# EAGLE board Shield (EAGLE 9.5.1)
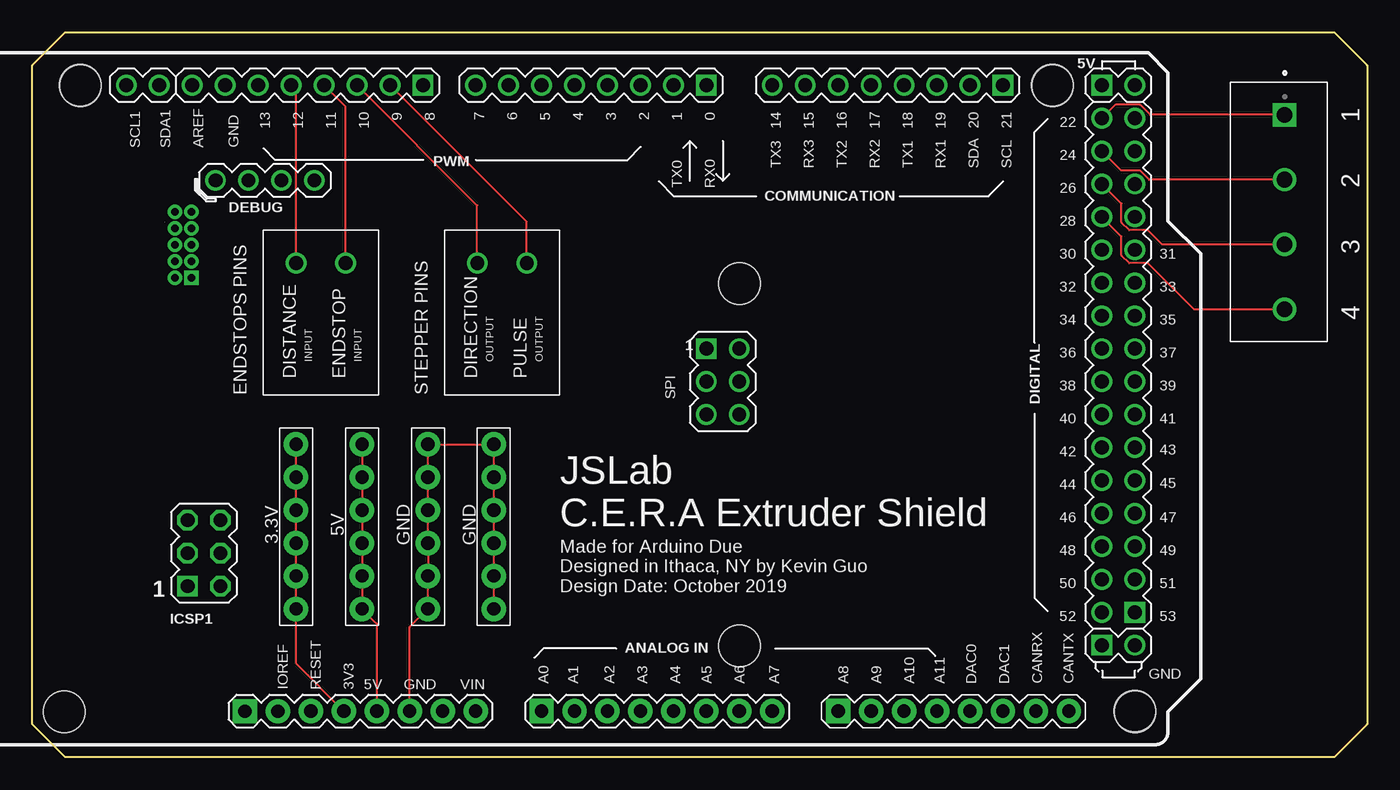
[diagram p0: board, top side]

Size 102.87 x 55.88 mm. Coordinates in mm from the lower left corner, seen from the top.
Outline: 2.54,0 0,2.54 0,53.34 2.54,55.88 100.33,55.88 102.87,53.34 102.87,2.54 100.33,0 2.54,0
Copper layers (1*16): Top 0.035mm / dielectric 1.5mm / Bottom 0.035mm
Design rules "default": minimum track width 6mil, minimum drill 0.35mm, track to track 6mil, track to pad 6mil, pad to pad 6mil, via to via 6mil, smd to smd 6mil, copper to edge 40mil, drill to drill 6mil, minimum pad ring 10mil, minimum via ring 8mil, stop-mask expansion 4mil, vias tented up to drill 0mil, thermal gap 10mil

## Footprints (pad centres in the part's own frame; a part is rotated, then mirrored left to right if it is on the bottom)
TE_1776266-4 = drill 1.2 square: 1 0,0 | drill 1.2: 2 5,0; 3 10,0; 4 15,0
ARDUINO_DUE_SHIELD = drill 1.067 square: 0 63.373,51.816; 5V0_1 93.853,51.816; 8 41.529,51.816; 21 86.233,51.816; 53 96.393,11.176; GND_2 93.853,8.636; MISO 63.373,31.496; MISO2 23.384,13.196 | drill 1.067: 1 60.833,51.816; 2 58.293,51.816; 3 55.753,51.816; 4 53.213,51.816; 5 50.673,51.816; 5V0_2 96.393,51.816; 5V_2 65.913,31.496; 6 48.133,51.816; 7 45.593,51.816; 9 38.989,51.816; 10 36.449,51.816; 11 33.909,51.816; 12 31.369,51.816; 13 28.829,51.816; 14 68.453,51.816; 15 70.993,51.816; 16 73.533,51.816; 17 76.073,51.816; 18 78.613,51.816; 19 81.153,51.816; 20 83.693,51.816; 22 93.853,49.276; 23 96.393,49.276; 24 93.853,46.736; 25 96.393,46.736; 26 93.853,44.196; 27 96.393,44.196; 28 93.853,41.656; 29 96.393,41.656; 30 93.853,39.116; 31 96.393,39.116; 32 93.853,36.576; 33 96.393,36.576; 34 93.853,34.036; 35 96.393,34.036; 36 93.853,31.496; 37 96.393,31.496; 38 93.853,28.956; 39 96.393,28.956; 40 93.853,26.416; 41 96.393,26.416; 42 93.853,23.876; 43 96.393,23.876; 44 93.853,21.336; 45 96.393,21.336; 46 93.853,18.796; 47 96.393,18.796; 48 93.853,16.256; 49 96.393,16.256; 50 93.853,13.716; 51 96.393,13.716; 52 93.853,11.176; AREF 23.749,51.816; DIRECTION 45.72,38.1; DIST 31.75,38.1; ENDSTOP 35.56,38.1; GND_3 96.393,8.636; GND_4 26.289,51.816; GND_5 65.913,26.416; GND_7 33.161,44.473; JTAG_TCK 30.621,44.473; JTAG_TMS 28.081,44.473; MASTER_RESET_JTAG 25.541,44.473; MASTER_RESET_SPI 63.373,26.416; MOSI 65.913,28.956; PULSE 49.53,38.1; SCL1 18.669,51.816; SDA1 21.209,51.816; SPCK 63.373,28.956 | drill 1.016 pad 1.88: 3V3 35.433,3.556; 3V3X1 31.75,11.43; 3V3X2 31.75,13.97; 3V3X3 31.75,16.51; 3V3X4 31.75,19.05; 3V3X5 31.75,21.59; 3V3X6 31.75,24.13; 5V0 37.973,3.556; 5V0X1 36.83,11.43; 5V0X2 36.83,13.97; 5V0X3 36.83,16.51; 5V0X4 36.83,19.05; 5V0X5 36.83,21.59; 5V0X6 36.83,24.13; A1 53.213,3.556; A2 55.753,3.556; A3 58.293,3.556; A4 60.833,3.556; A5 63.373,3.556; A6 65.913,3.556; A7 68.453,3.556; A9 76.073,3.556; A10 78.613,3.556; A11 81.153,3.556; CANRX 88.773,3.556; CANTX 91.313,3.556; DAC0 83.693,3.556; DAC1 86.233,3.556; GND 40.513,3.556; GND_1 43.053,3.556; GNDX1 41.91,11.43; GNDX2 41.91,13.97; GNDX3 41.91,16.51; GNDX4 41.91,19.05; GNDX5 41.91,21.59; GNDX6 41.91,24.13; GNDX7 46.99,11.43; GNDX8 46.99,13.97; GNDX9 46.99,16.51; GNDX10 46.99,19.05; GNDX11 46.99,21.59; GNDX12 46.99,24.13; IOREF 30.346,3.543; RESET 32.893,3.555; VIN 45.593,3.556 | drill 0.6 pad 1.016 square: 3V3_JTAG 23.689,36.964 | drill 1.067 octagon: 5V_ICSP1 25.924,13.196; GND_ICSP1 25.924,18.276; MOSI2 25.924,15.736; RESET2 23.384,18.276; SCK2 23.384,15.736 | drill 1.016 pad 1.88 square: A0 50.673,3.556; A8 73.533,3.556; NC_2 27.806,3.543 | drill 0.6 pad 1.143: GND_8 23.689,38.234; GND_9 23.689,40.774; GND_10 23.689,42.044; JTAG_RESET 22.419,42.044; JTAG_TCK_2 22.419,38.234; JTAG_TDI 22.419,40.774; JTAG_TDO 22.419,39.504; JTAG_TMS_2 22.419,36.964; NC_5 23.689,39.504 | hole 3.2: 15.113,51.816; 90.043,51.816; 96.393,3.556; 96.418,3.505; 15.138,51.765; 90.068,51.765; 13.868,3.505; 65.938,36.525; 65.938,8.585

## Placement (x,y rotation side)
E$1  [TE_1776266-4]  96.52,49.53 270 top
E$2  [ARDUINO_DUE_SHIELD]  -11.43,0 0 top

## Library data of the parts
E$1 = 1776266-4
E$2 = arduino_due_shield

## Nets
S$1: E$2.9 E$2.PULSE
S$2: E$2.10 E$2.DIRECTION
S$3: E$2.11 E$2.ENDSTOP
S$4: E$2.12 E$2.DIST
S$5: E$1.1 E$2.22
S$6: E$1.2 E$2.24
S$7: E$1.3 E$2.26
S$8: E$1.4 E$2.28
S$9: E$2.3V3 E$2.3V3X1 E$2.3V3X2 E$2.3V3X3 E$2.3V3X4 E$2.3V3X5 E$2.3V3X6
S$10: E$2.5V0 E$2.5V0X1 E$2.5V0X2 E$2.5V0X3 E$2.5V0X4 E$2.5V0X5 E$2.5V0X6
S$11: E$2.GND E$2.GNDX1 E$2.GNDX2 E$2.GNDX3 E$2.GNDX4 E$2.GNDX5 E$2.GNDX6 E$2.GNDX7 E$2.GNDX8 E$2.GNDX9 E$2.GNDX10 E$2.GNDX11 E$2.GNDX12

## Tracks (layer width: path | path; a pad name or v marks a point on that pad's centre or on a via)
S$1
  Top 0.152: E$2.PULSE 38.1,41.27 E$2.9
S$2
  Top 0.152: E$2.DIRECTION 34.29,42.55 E$2.10
S$3
  Top 0.152: E$2.ENDSTOP 24.13,50.16 E$2.11
S$4
  Top 0.152: E$2.DIST 20.32,51.44 E$2.12
S$5
  Top 0.152: E$1.1 86.16,49.53 85.39,50.3 83.45,50.3 E$2.22
S$6
  Top 0.152: E$1.2 86.08,44.53 85.39,45.23 83.93,45.23 E$2.24
S$7
  Top 0.152: E$1.3 87.09,39.53 85.99,40.63 84.54,40.63 83.93,41.23 83.93,42.69 E$2.26
S$8
  Top 0.152: E$1.4 89.55,34.53 85.99,38.09 84.54,38.09 83.93,38.69 83.93,40.15 E$2.28
S$9
  Top 0.152: E$2.3V3 20.32,7.24 E$2.3V3X1 E$2.3V3X2 E$2.3V3X3 E$2.3V3X4 E$2.3V3X5 E$2.3V3X6
S$10
  Top 0.152: E$2.5V0X6 E$2.5V0X5 E$2.5V0X4 E$2.5V0X3 E$2.5V0X2 E$2.5V0X1 26.54,10.29 E$2.5V0
S$11
  Top 0.152: E$2.GND 29.08,10.03 E$2.GNDX1 E$2.GNDX2 E$2.GNDX3 E$2.GNDX4 E$2.GNDX5 E$2.GNDX6 E$2.GNDX12 E$2.GNDX11 E$2.GNDX10 E$2.GNDX9 E$2.GNDX8 E$2.GNDX7

## Text on the board
tNames: 1 | 2 | 3 | 4